# EAGLE board adaptador_scart_v1 (EAGLE 7.2.0)
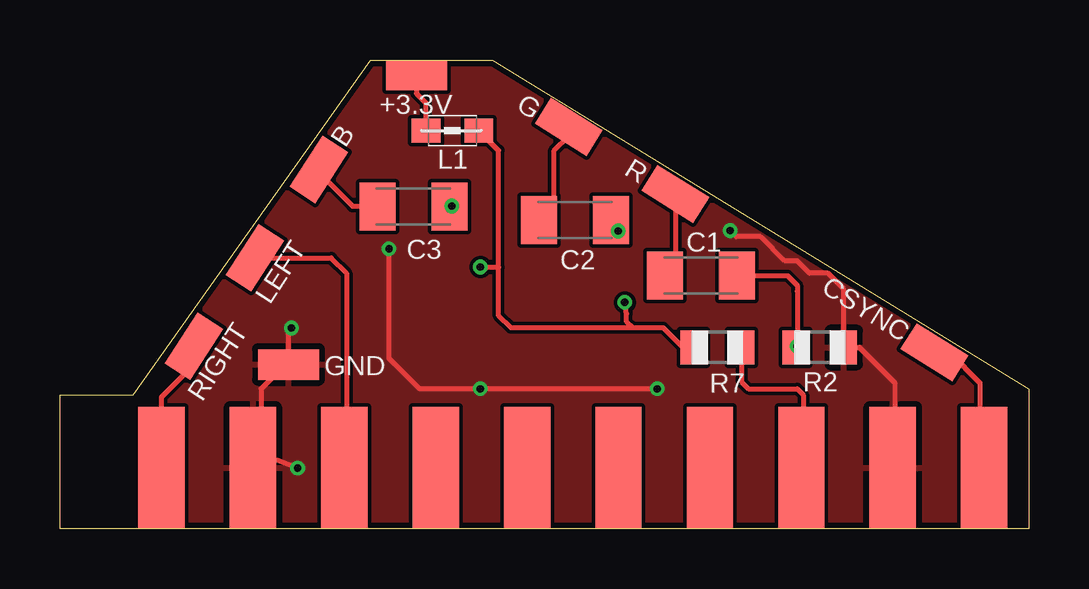
[diagram p0: board, top side]
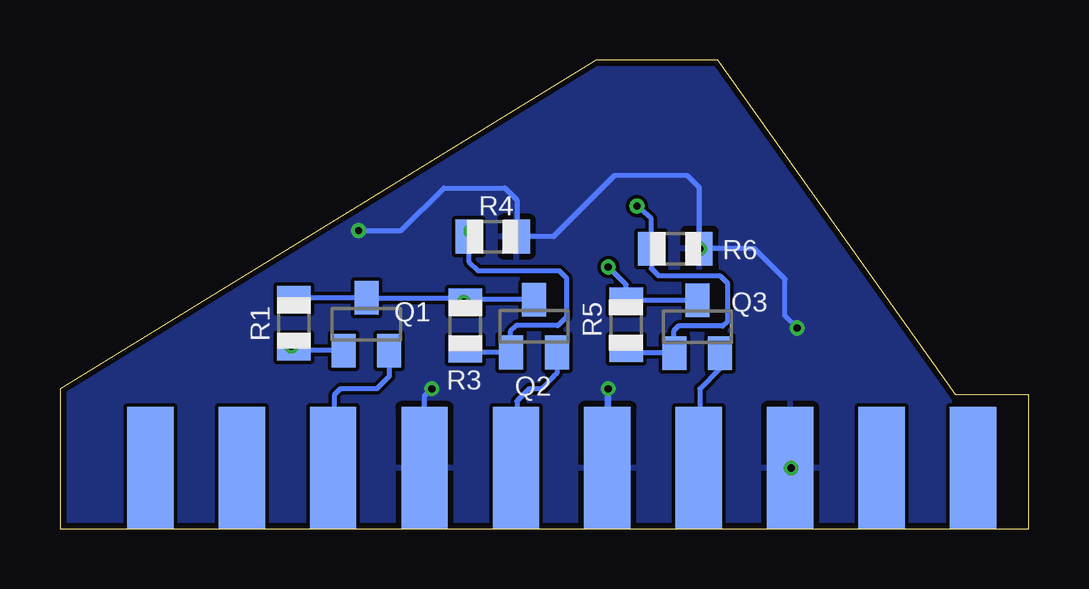
[diagram p1: board, bottom side, seen from below]

Size 40.39 x 19.56 mm. Coordinates in mm from the lower left corner, seen from the top.
Outline: 0,0 0,5.59 3.05,5.59 12.95,19.56 18.03,19.56 40.39,5.84 40.39,0 0,0
Copper layers (1*16): Top 0.035mm / dielectric 1.5mm / Bottom 0.035mm
Design rules "seedstudio_Fusion_eagle_rule_v1.1": minimum track width 6mil, minimum drill 12mil, track to track 6mil, track to pad 6mil, pad to pad 6mil, via to via 6mil, smd to smd 0mil, copper to edge 10mil, drill to drill 10mil, minimum pad ring 10mil, minimum via ring 6mil, stop-mask expansion 2mil, vias tented up to drill 100mil, thermal gap 10mil

## Footprints (pad centres in the part's own frame; a part is rotated, then mirrored left to right if it is on the bottom)
SMD1,27-2,54 = smd 1.27 x 2.54: 1 0,0
C1206K = smd 1.5 x 2: 1 -1.5,0; 2 1.5,0
0805 = smd 1.2 x 1: 1 -1.1,0; 2 1.1,0
SOT23 = smd 1 x 1.4: 1 -0.95,-1.1; 2 0.95,-1.1; 3 0,1.1
R0805 = smd 1.1 x 1.4: 1 -1,0; 2 1,0
SCART-PCB = smd 1.93 x 5.08: 1 17.145,0; 3 13.335,0; 5 9.525,0; 7 5.715,0; 9 1.905,0; 11 -1.905,0; 13 -5.715,0; 15 -9.525,0; 17 -13.335,0; 19 -17.145,0 | smd 1.93 x 5.08 bottom: 2 15.24,0; 4 11.43,0; 6 7.62,0; 8 3.81,0; 10 0,0; 12 -3.81,0; 14 -7.62,0; 16 -11.43,0; 18 -15.24,0; 20 -19.05,0

## Placement (x,y rotation side)
+3.3V  [SMD1,27-2,54]  14.86,18.92 90 top
B  [SMD1,27-2,54]  10.79,14.99 147 top
C1  1uF  [C1206K]  26.72,10.57 0 top
C2  1uF  [C1206K]  21.46,12.88 0 top
C3  1uF  [C1206K]  14.73,13.44 0 top
CSYNC  [SMD1,27-2,54]  36.45,7.37 58 top
G  [SMD1,27-2,54]  21.21,16.76 58 top
GND  [SMD1,27-2,54]  9.53,6.86 90 top
L1  [0805]  16.36,16.61 0 top
LEFT  [SMD1,27-2,54]  8.13,11.3 147 top
Q1  2N3904  [SOT23]  27.61,8.53 0 bottom
Q2  2N3904  [SOT23]  20.62,8.46 0 bottom
Q3  2N3904  [SOT23]  13.82,8.43 0 bottom
R  [SMD1,27-2,54]  25.65,13.97 58 top
R1  10K  [R0805]  30.63,8.59 90 bottom
R2  22K  [R0805]  31.67,7.57 180 top
R3  10K  [R0805]  23.5,8.48 90 bottom
R4  22K  [R0805]  22.35,12.19 180 bottom
R5  10K  [R0805]  16.79,8.51 90 bottom
R6  22K  [R0805]  14.73,11.68 180 bottom
R7  50  [R0805]  27.41,7.57 180 top
RIGHT  [SMD1,27-2,54]  5.59,7.62 147 top
U$1  SCART-MALE-PCB  [SCART-PCB]  19.47,2.54 0 bottom

## Library data of the parts
+3.3V B CSYNC G GND LEFT R RIGHT = wirepad
C1-C3 = rcl
L1 = wuerth-elektronik
Q1-Q3 = transistor-npn
R1-R7 = adafruit
U$1 = con-hirschmann

## Nets
BIN: B.1 C3.1
BOUT: Q3.2 U$1.7
CSYNC: CSYNC.1 U$1.20
FS: R7.1 U$1.16
GIN: C2.1 G.1
GND: GND.1 R2.1 R4.1 R6.1 U$1.4 U$1.5 U$1.9 U$1.13 U$1.18
GOUT: Q2.2 U$1.11
LEFT: LEFT.1 U$1.6
N$4: C1.2 Q1.1 R1.1 R2.2
N$8: C3.2 Q3.1 R5.1 R6.2
N$11: C2.2 Q2.1 R3.1 R4.2
RIGHT: RIGHT.1 U$1.2
RIN: C1.1 R.1
ROUT: Q1.2 U$1.15
VCC: L1.2 Q1.3 Q2.3 Q3.3 R1.2 R3.2 R5.2 R7.2
VCCIN: +3.3V.1 L1.1

## Tracks (layer width: path | path; a pad name or v marks a point on that pad's centre or on a via)
BIN
  Top 0.203: B.1 10.79,14.86 12.19,13.46 13.71,13.46 C3.1
BOUT
  Bottom 0.203: Q3.2 12.87,6.69 13.72,5.84 13.72,2.58 U$1.7
CSYNC
  Top 0.203: CSYNC.1 37.08,7.37 38.35,6.1 38.35,2.71 U$1.20
FS
  Top 0.203: R7.1 28.41,6.14 28.7,5.84 30.73,5.84 30.99,5.59 30.99,2.62 U$1.16
GIN
  Top 0.203: G.1 21.21,16.38 20.57,15.75 20.57,12.99 C2.1
GND  (via drill 0.3 pad 0.61)
  Top 0.203: 8.38,2.88 8.38,5.84 9.4,6.86 GND.1 9.53,8.26 v9.65,8.38 | 8.38,2.88 U$1.4 | U$1.18 34.8,2.62 34.8,6.1 33.33,7.57 R2.1 32.67,10 32,10.67 31.24,10.67 30.73,11.18 30.23,11.18 29.21,12.19 28.19,12.19 v27.94,12.45 | 8.38,2.88 9.06,2.88 v9.91,2.54 | v24.89,5.84 v17.53,5.84 14.99,5.84 13.72,7.11 v13.72,11.68
  Bottom 0.203: v9.65,8.38 10.16,8.89 10.16,10.41 11.43,11.68 R6.1 | R6.1 13.73,14.24 14.22,14.73 17.27,14.73 19.81,12.19 R4.1 21.34,12.21 21.34,13.72 21.84,14.22 24.38,14.22 26.16,12.45 v27.94,12.45 | v9.91,2.54 U$1.5 | U$1.5 | U$1.13 25.19,5.55 v24.89,5.84 | v13.72,11.68 13.72,11.67 R6.1 | v17.53,5.84 17.53,2.58 U$1.9 17.57,5.8 v17.53,5.84
  pour Bottom: 0,0 0,5.59 3.05,5.59 12.95,19.56 18.03,19.56 40.39,5.84 40.39,0
  pour Top: 0,0 40.39,0 40.39,5.84 18.03,19.56 12.95,19.56 3.05,5.59 0,5.59
GOUT
  Bottom 0.203: Q2.2 19.68,6.49 19.81,6.35 20.32,5.84 20.83,5.84 21.34,5.33 21.34,2.58 U$1.11
LEFT
  Top 0.203: LEFT.1 11.3,11.3 11.94,10.67 11.94,2.62 U$1.6
N$4  (via drill 0.3 pad 0.61)
  Top 0.203: R2.2 30.88,7.37 v30.73,7.62 30.73,9.91 30.73,10.16 30.33,10.57 C1.2
  Bottom 0.203: Q1.1 30.48,7.43 R1.1 30.63,7.72 v30.73,7.62
N$8  (via drill 0.3 pad 0.61)
  Top 0.203: v16.33,13.46 15.75,13.42 C3.2
  Bottom 0.203: R5.1 16.61,7.33 Q3.1 14.81,7.37 14.81,8.26 14.61,8.46 12.75,8.46 12.57,8.64 12.57,10.26 12.88,10.57 15.44,10.57 15.73,10.86 R6.2 15.73,12.94 v16.33,13.46
N$11  (via drill 0.3 pad 0.61)
  Top 0.203: C2.2 23.19,12.88 v23.27,12.42
  Bottom 0.203: R3.1 23.37,7.36 Q2.1 21.61,7.4 21.61,8.23 21.36,8.48 19.63,8.48 19.28,8.84 19.28,10.46 19.58,10.77 22.96,10.77 23.35,11.16 R4.2 23.37,12.21 v23.27,12.42
RIGHT
  Top 0.203: U$1.2 4.23,5.5 5.84,7.11 5.84,7.37 RIGHT.1
RIN
  Top 0.203: R.1 25.65,10.63 C1.1
ROUT
  Bottom 0.203: Q1.2 26.66,6.36 27.18,5.84 28.7,5.84 28.96,5.59 28.96,2.58 U$1.15
VCC  (via drill 0.3 pad 0.61)
  Top 0.203: R7.2 25.96,7.57 25.15,8.38 | 25.15,8.38 18.8,8.38 18.29,8.89 18.29,10.92 | 18.29,10.92 18.29,15.78 L1.2 | v17.53,10.92 18.29,10.92 | 25.15,8.38 23.88,8.38 23.62,8.64 23.62,8.97 v23.55,9.45
  Bottom 0.203: Q3.3 16.77,9.53 R5.2 16.79,10.19 v17.53,10.92 | Q2.3 23.42,9.56 R3.2 | R1.2 30.58,9.63 Q1.3 23.65,9.63 R3.2 | v23.55,9.45 23.65,9.33 R3.2
VCCIN
  Top 0.203: +3.3V.1 14.86,18.16 15.24,17.78 15.24,16.63 L1.1

## Text on the board
201bmp: C:/Users/rodriguj/Documents/zxspectrum/zxuno/repositorio/hardware/otros/zxuno2scart/silueta.bmp